# Altium PCB MPBoard_ext.PcbDoc (part 2 of 3)
Units mm, origin at the board's own origin, x right, y up, seen from the top; angles counter-clockwise.
Board outline 305 x 110 mm, 2 copper layers (Top Layer, Bottom Layer), stack 1.571 mm thick; 340 components, 268 nets, 1174 pads, 215 vias.
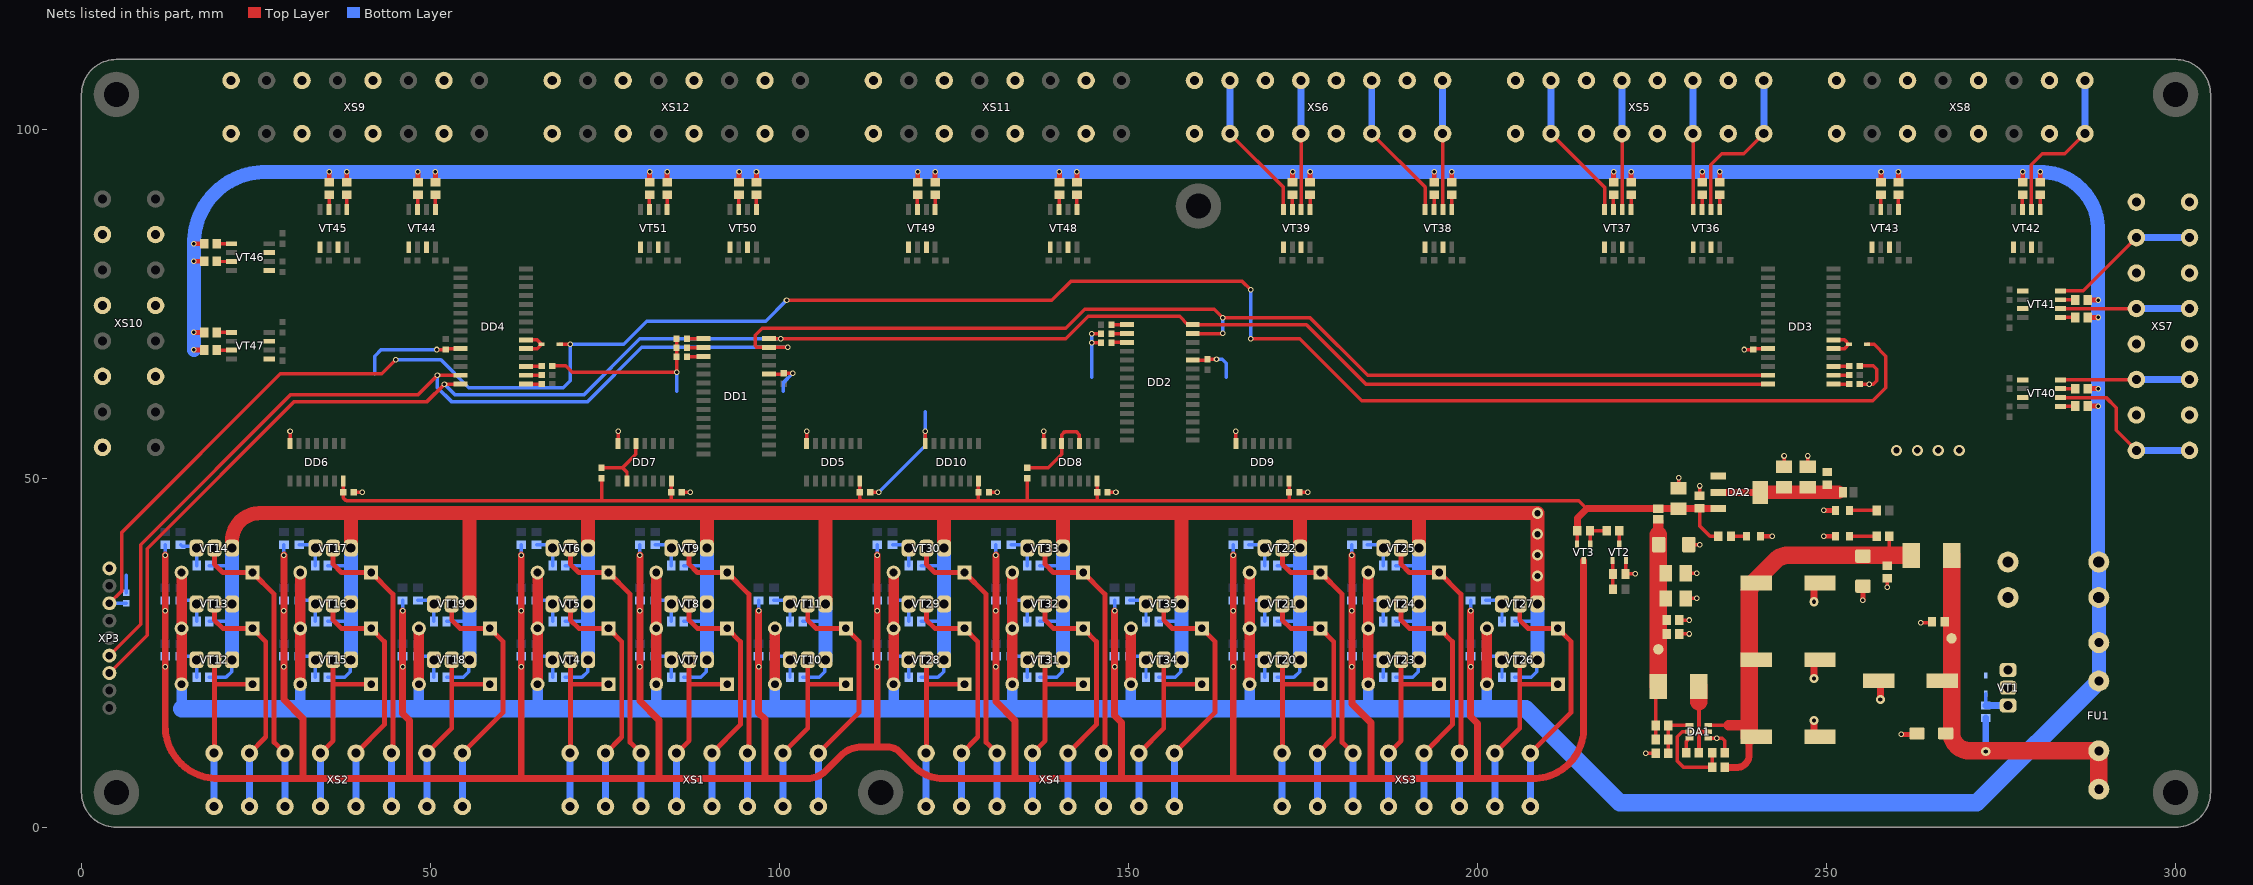
[diagram p2: the nets of this part, all layers, seen from the top]

## Via types
v1: diameter 0.8, hole 0.5, Top Layer to Bottom Layer, 201 vias
v2: diameter 1.6, hole 0.9, Top Layer to Bottom Layer, 8 vias
v3: diameter 1.3, hole 0.6, Top Layer to Bottom Layer, 6 vias

## Nets (pads, with @x,y where several pads share a name; then routed paths per layer and width w, separated by ;. In a path a pad name is that pad's centre, name@x,y a point inside that pad or via, vN(x,y) a via of type N, cw(c..) or ccw(c..) an arc to the next point about the centre after c; other vN are vias at no path point) (continued)
+5V: C13.1 C14.2 C22.2 C23.2 C24.2 C25.2 C26.2 C27.2 DA2.3 DD5.14 DD6.14 DD7.14 DD8.14 DD9.14 DD10.14 J1.2 R7.1 R12.2 R186.1 R187.2 VT3.2 | length 235.6
  Top Layer w0.5: DD6.14@37.5,49.6 C23.2@37.5,48 37.5,47.4 ccw(c38.1,47.4) 38.1,46.8 74.5,46.8 ; R186.1@74.5,50 74.5,46.8 ; DD7.14@84.5,49.6 C24.2@84.5,48 84.5,46.8 ; DD5.14@111.5,49.6 111.5,47.093 111.793,46.8 115.5,46.8 ; DD10.14@128.5,49.6 C27.2@128.5,48 128.5,46.8 ; R187.2@135.5,50 135.5,46.8 ; DD8.14@145.5,49.6 C25.2@145.5,48 145.5,46.8 ; DD9.14@173,49.6 C26.2@173,48 173,46.8 ; VT3.2@214.25,40.6 214.25,42.45 R12.2@214.3,42.5 ; 215.65,45.65 214.5,46.8 173,46.8 ; C14.2@231.8,45.7 231.8,43.2 233.3,41.7 R7.1@234.5,41.7 ; 74.5,46.8 84.5,46.8 ; 84.5,46.8 115.5,46.8 ; 115.5,46.8 128.5,46.8 ; 128.5,46.8 135.5,46.8 ; 135.5,46.8 145.5,46.8 ; 145.5,46.8 173,46.8
  Top Layer w1: R12.2@214.3,42.5 214.3,44.3 215.65,45.65 J1.2@225.9,45.65 C13.1@228.8,45.65 ; C13.1@228.85,45.7 C14.2@231.8,45.7 DA2.3@234.5,45.7
+24V: FU1.1 FU1.3 R134.1 R135.1 R136.1 R137.1 R138.1 R139.1 R140.1 R141.1 R142.1 R143.1 R144.1 R145.1 R146.1 R147.1 R148.1 R149.1 R169.1 R170.1 R171.1 R172.1 R173.1 R174.1 R175.1 R176.1 R177.1 R178.1 R179.1 R180.1 R181.1 R182.1 R183.1 R184.1 VD5.2 VD6.2 VD7.2 VD8.2 VD9.2 VD10.2 VD11.2 VD12.2 VD13.2 VD14.2 VD15.2 VD16.2 VD17.2 VD18.2 VD19.2 VD20.2 VD21.2 VD22.2 VD23.2 VD24.2 VD25.2 VD26.2 VD27.2 VD28.2 VD29.2 VD30.2 VD31.2 VD32.2 VD33.2 VD34.2 VD35.2 VD36.2 XP1.1 XP1.2 | length 900.7
  Top Layer w0.7: v1(16.1,68.4) R176.1@17.6,68.4 ; v1(16.1,70.9) R175.1@17.6,70.9 ; v1(16.1,81.1) R174.1@17.6,81.1 ; v1(16.1,83.6) R173.1@17.6,83.6 ; R172.1@35.5,92.4 v1(35.5,93.9) ; R171.1@38,92.4 v1(38,93.9) ; R170.1@48.2,92.4 v1(48.2,93.9) ; R169.1@50.7,92.4 v1(50.7,93.9) ; R184.1@81.4,92.4 v1(81.4,93.9) ; R183.1@83.9,92.4 v1(83.9,93.9) ; R182.1@94.2,92.4 v1(94.2,93.9) ; R181.1@96.7,92.4 v1(96.7,93.9) ; R180.1@119.8,92.4 v1(119.8,93.9) ; R179.1@122.3,92.4 v1(122.3,93.9) ; R178.1@140.1,92.4 v1(140.1,93.9) ; R177.1@142.6,92.4 v1(142.6,93.9) ; R141.1@173.5,92.4 v1(173.5,93.9) ; R140.1@176,92.4 v1(176,93.9) ; R139.1@193.8,92.4 v1(193.8,93.9) ; R138.1@196.3,92.4 v1(196.3,93.9) ; R137.1@219.5,92.4 v1(219.5,93.9) ; R136.1@222,92.4 v1(222,93.9) ; R135.1@232.2,92.4 v1(232.2,93.9) ; R134.1@234.7,92.4 v1(234.7,93.9) ; R149.1@257.8,92.4 v1(257.8,93.9) ; R148.1@260.3,92.4 v1(260.3,93.9) ; R147.1@278.1,92.4 v1(278.1,93.9) ; R146.1@280.6,92.4 v1(280.6,93.9) ; R142.1@287.4,60.34 v1(288.9,60.34) ; R143.1@287.4,62.84 v1(288.9,62.84) ; R144.1@287.4,73.04 v1(288.9,73.04) ; R145.1@287.4,75.54 v1(288.9,75.54)
  Top Layer w1.5: VD13.2@14.34,20.5 VD15.2@14.34,36.5 ; VD16.2@31.34,20.5 VD17.2@31.34,28.5 VD18.2@31.34,36.5 ; VD19.2@48.34,20.5 VD20.2@48.34,28.5 ; VD5.2@65.34,20.5 VD7.2@65.34,36.5 ; VD8.2@82.34,20.5 VD9.2@82.34,28.5 VD10.2@82.34,36.5 ; VD11.2@99.34,20.5 VD12.2@99.34,28.5 ; VD29.2@116.34,20.5 VD30.2@116.34,28.5 VD31.2@116.34,36.5 ; VD32.2@133.34,20.5 VD33.2@133.34,28.5 VD34.2@133.34,36.5 ; VD35.2@150.34,20.5 VD36.2@150.34,28.5 ; VD21.2@167.34,20.5 VD22.2@167.34,28.5 VD23.2@167.34,36.5 ; VD24.2@184.34,20.5 VD25.2@184.34,28.5 VD26.2@184.34,36.5 ; VD27.2@201.34,20.5 VD28.2@201.34,28.5
  Bottom Layer w1.5: 14.34,17 VD13.2@14.34,20.5 ; 31.34,17 VD16.2@31.34,20.5 ; 48.34,17 VD19.2@48.34,20.5 ; 65.34,17 VD5.2@65.34,20.5 ; 82.34,17 VD8.2@82.34,20.5 ; 99.34,17 VD11.2@99.34,20.5 ; 116.34,17 VD29.2@116.34,20.5 ; 133.34,17 VD32.2@133.34,20.5 ; 150.34,17 VD35.2@150.34,20.5 ; 167.34,17 VD21.2@167.34,20.5 ; 184.34,17 VD24.2@184.34,20.5 ; 201.34,17 VD27.2@201.34,20.5
  Bottom Layer w2: v1(16.1,68.4) v1(16.1,70.9) v1(16.1,81.1) v1(16.1,83.6) cw(c26.4,83.6) 26.4,93.9 v1(35.5,93.9) v1(38,93.9) v1(48.2,93.9) v1(50.7,93.9) v1(81.4,93.9) v1(83.9,93.9) v1(94.2,93.9) v1(96.7,93.9) v1(119.8,93.9) v1(122.3,93.9) v1(173.5,93.9) v1(176,93.9) v1(193.8,93.9) v1(196.3,93.9) v1(219.5,93.9) v1(222,93.9) v1(232.2,93.9) v1(234.7,93.9) v1(257.8,93.9) v1(260.3,93.9) v1(278.1,93.9) v1(280.6,93.9) cw(c280.6,85.6) 288.9,85.6 v1(288.9,75.54) v1(288.9,73.04) v1(288.9,62.84) v1(288.9,60.34) XP1.1@288.9,38 ; FU1.3@289,20.96 FU1.1@289,26.46 XP1.2@289,32.92 XP1.1@289,38
  Bottom Layer w2.5: 14.34,17 31.34,17 48.34,17 65.34,17 82.34,17 99.34,17 116.34,17 133.34,17 150.34,17 167.34,17 184.34,17 201.34,17 206.9,17 220.4,3.5 271.54,3.5 FU1.3@289,20.96
cPNP: R17.1 R20.1 R23.1 R26.1 R29.1 R32.1 R35.1 R38.1 R41.1 R44.1 R47.1 R50.1 R53.1 R56.1 R59.1 R62.1 R68.1 R71.1 R74.1 R77.1 R80.1 R83.1 R86.1 R89.1 R92.1 R95.1 R98.1 R101.1 R104.1 R107.1 R110.1 R113.1 VT3.3 | length 632.7
  Top Layer w1: v1(12,39) v1(12,31) v1(12,23) 12,14.5 ccw(c19.5,14.5) 19.5,7 31.7,7 ; v1(29,39) v1(29,31) v1(29,23) 29,18.3 31.7,15.6 31.7,7 ; v1(46,31) v1(46,23) 46,16.3 47,15.3 47,7 ; v1(63,39) v1(63,31) v1(63,23) 63,7 ; v1(80,39) v1(80,31) v1(80,23) 80,18.1 82.7,15.4 82.7,7 ; v1(97,31) v1(97,23) 97,16.4 97.9,15.5 97.9,7 ; v1(114,39) v1(114,31) v1(114,23) 114,11.5 ; v1(131,39) v1(131,31) v1(131,23) 131,18 133.7,15.3 133.7,7 ; v1(148,31) v1(148,23) 148,16 149,15 149,7 ; v1(165,39) v1(165,31) v1(165,23) 165,7 ; v1(182,39) v1(182,31) v1(182,23) 182,17.7 184.7,15 184.7,7 ; v1(199,31) v1(199,23) 199,15.9 200,14.9 200,7 ; VT3.3@215.2,38.2 215.2,14.2 cw(c208,14.2) 208,7 200,7 ; 31.7,7 47,7 ; 47,7 63,7 ; 63,7 82.7,7 ; 82.7,7 97.9,7 ; 97.9,7 104.086,7 ccw(c104.086,10.414) 106.5,8 108.793,10.293 cw(c111.707,7.379) 111.707,11.5 114,11.5 ; 114,11.5 115.5,11.5 cw(c115.5,9.086) 117.207,10.793 119.293,8.707 ccw(c123.414,12.828) 123.414,7 133.7,7 ; 133.7,7 149,7 ; 149,7 165,7 ; 165,7 184.7,7 ; 184.7,7 200,7
  Bottom Layer w0.5: v1(12,23) R41.1@12,24.5 ; v1(12,31) R44.1@12,32.5 ; v1(12,39) R47.1@12,40.5 ; v1(29,23) R50.1@29,24.5 ; v1(29,31) R53.1@29,32.5 ; v1(29,39) R56.1@29,40.5 ; v1(46,23) R59.1@46,24.5 ; v1(46,31) R62.1@46,32.5 ; v1(63,23) R17.1@63,24.5 ; v1(63,31) R20.1@63,32.5 ; v1(63,39) R23.1@63,40.5 ; v1(80,23) R26.1@80,24.5 ; v1(80,31) R29.1@80,32.5 ; v1(80,39) R32.1@80,40.5 ; v1(97,23) R35.1@97,24.5 ; v1(97,31) R38.1@97,32.5 ; v1(114,23) R92.1@114,24.5 ; v1(114,31) R95.1@114,32.5 ; v1(114,39) R98.1@114,40.5 ; v1(131,23) R101.1@131,24.5 ; v1(131,31) R104.1@131,32.5 ; v1(131,39) R107.1@131,40.5 ; v1(148,23) R110.1@148,24.5 ; v1(148,31) R113.1@148,32.5 ; v1(165,23) R68.1@165,24.5 ; v1(165,31) R71.1@165,32.5 ; v1(165,39) R74.1@165,40.5 ; v1(182,23) R77.1@182,24.5 ; v1(182,31) R80.1@182,32.5 ; v1(182,39) R83.1@182,40.5 ; v1(199,23) R86.1@199,24.5 ; v1(199,31) R89.1@199,32.5
GND: C2.2 C3.2 C4.2 C5.2 C6.2 C7.2 C8.2 C9.2 C10.2 C11.2 C13.2 C14.1 C15.1 C16.2 C17.2 C18.1 C19.1 C20.1 C21.1 C22.1 C23.1 C24.1 C25.1 C26.1 C27.1 DA1.1 DA2.1 DD1.10 DD2.10 DD3.10 DD4.10 DD5.7 DD6.7 DD7.7 DD8.7 DD9.7 DD10.7 HL1.2 HL2.2 HL3.2 R4.2 R6.2 R10.2 R13.1 R14.1 R15.1 R18.1 R21.1 R24.1 R27.1 R30.1 R33.1 R36.1 R39.1 R42.1 R45.1 R48.1 R51.1 R54.1 R57.1 R60.1 R63.1 R65.1 R66.1 R69.1 R72.1 R75.1 R78.1 R81.1 R84.1 R87.1 R90.1 R93.1 R96.1 R99.1 R102.1 R105.1 R108.1 R111.1 R114.1 R131.2 R133.1 R168.1 R185.1 VD1.1 VD2.1 VD3.1 VD4.1 VT1.3 VT2.2 VT4.3 VT5.3 VT6.3 VT7.3 VT8.3 VT9.3 VT10.3 VT11.3 VT12.3 VT13.3 VT14.3 VT15.3 VT16.3 VT17.3 VT18.3 VT19.3 VT20.3 VT21.3 VT22.3 VT23.3 VT24.3 VT25.3 VT26.3 VT27.3 VT28.3 VT29.3 VT30.3 VT31.3 VT32.3 VT33.3 VT34.3 VT35.3 VT36.5 VT36.7 VT37.5 VT37.7 VT38.5 VT38.7 VT39.5 VT39.7 VT40.5 VT40.7 VT41.5 VT41.7 VT42.5 VT42.7 VT43.5 VT43.7 VT44.5 VT44.7 VT45.5 VT45.7 VT46.5 VT46.7 VT47.5 VT47.7 VT48.5 VT48.7 VT49.5 VT49.7 VT50.5 VT50.7 VT51.5 VT51.7 XP3.9 XS5.2 XS5.4 XS5.6 XS5.8 XS5.10 XS5.12 XS5.14 XS5.16 XS6.2 XS6.4 XS6.6 XS6.8 XS6.10 XS6.12 XS6.14 XS6.16 XS7.2 XS7.4 XS7.6 XS7.8 XS7.10 XS7.12 XS7.14 XS7.16 XS8.2 XS8.4 XS8.6 XS8.8 XS8.10 XS8.12 XS8.14 XS8.16 XS9.2 XS9.4 XS9.6 XS9.8 XS9.10 XS9.12 XS9.14 XS9.16 XS10.2 XS10.4 XS10.6 XS10.8 XS10.10 XS10.12 XS10.14 XS11.2 XS11.4 XS11.6 XS11.8 XS11.10 XS11.12 XS11.14 XS11.16 XS12.2 XS12.4 XS12.6 XS12.8 XS12.10 XS12.12 XS12.14 XS12.16 | length 717.6
  Top Layer w0.5: DD6.7@29.88,55 v1@29.88,56.745 ; C23.1@39,48 v1(40.2,48) ; v1(50.9,68.45) C21.1@52.2,68.45 ; C21.1@52.32,68.57 DD4.10@54.3,68.57 ; R168.1@67.45,66.1 69.4,66.1 70.3,65.2 v1(85.3,65.2) 85.3,67.35 R15.1@85.25,67.4 R14.1@85.25,68.7 R13.1@85.25,70 ; DD7.7@76.88,55 v1@76.88,56.745 ; C24.1@86,48 v1(87.2,48) ; DD1.10@98.5,64.93 C18.1@100.48,64.93 ; C18.1@100.6,65.05 v1(101.9,65.05) ; DD5.7@103.88,55 v1@103.88,56.745 ; C22.1@113,48 v1(114.2,48) ; v1(120.875,56.75) 120.88,56.745 DD10.7@120.88,55 ; C27.1@130,48 v1(131.2,48) ; v1(137.875,56.75) 137.88,56.745 DD8.7@137.88,55 ; v1(144.7,69.4) R66.1@146.05,69.4 ; v1(144.7,70.7) R65.1@146.05,70.7 ; C25.1@147,48 v1(148.2,48) ; DD2.10@159.2,66.93 C19.1@161.18,66.93 ; C19.1@161.3,67.05 v1(162.6,67.05) ; v1(165.375,56.75) 165.38,56.745 DD9.7@165.38,55 ; C26.1@174.5,48 v1(175.7,48) ; R10.2@221.18,36.3 R10.2@221.2,36.3 ; VT2.2@221.25,38.2 221.25,36.35 R10.2@221.2,36.3 ; v1(222.6,36.3) R10.2@221.2,36.3 ; v1(224.08,10.6) R6.2@225.48,10.6 ; C13.2@228.8,48.55 v1(228.8,50.1) ; C10.2@228.92,27.7 v1(230.32,27.7) ; C11.2@228.92,29.7 v1(230.32,29.7) ; C8.2@229.85,32.8 v1(231.4,32.8) ; C9.2@229.85,36.4 v1(231.4,36.4) ; VD3.1@230.25,40.5 v1(231.8,40.5) ; C14.1@231.8,47.48 C14.1@231.8,47.5 v1(231.8,48.9) ; DA1.1@233.05,12.75 v1(234.25,12.75) 235.05,12.75 235.4,12.4 R4.2@235.4,10.7 ; v1(238.2,68.45) C20.1@239.5,68.45 239.62,68.57 DD3.10@241.6,68.57 ; C17.2@243.9,51.65 v1(243.9,53.2) ; C16.2@247.3,51.65 v1(247.3,53.2) ; R131.2@254.75,63.5 v1(256.1,63.5) 256.7,63.5 257.2,64 257.2,65.6 256.7,66.1 R133.1@254.75,66.1 ; v1(258.7,34.42) C7.2@258.7,35.72 ; v1(263.5,29.32) C2.2@264.8,29.32
  Top Layer w0.7: HL1.2@240.5,41.7 v1(242.2,41.7) ; v1(249.6,41.7) HL2.2@251.3,41.7 ; v1(249.6,45.4) HL3.2@251.3,45.4 ; v1(255.2,32.52) VD2.1@255.2,34.17 ; v1(260.7,13.32) VD1.1@262.55,13.32
  Top Layer w1: v3(248.2,15.32) 248.2,13.37 C4.2@248.75,12.82 ; v3(248.2,21.32) 248.2,23.27 C5.2@248.75,23.82 ; v3(248.2,32.32) 248.2,34.27 C6.2@248.75,34.82 ; C3.2@257.15,20.82 257.7,20.27 v3(257.7,18.32)
  Top Layer w2: VT14.3@21.58,40 21.58,41.08 cw(c25.5,41.08) 25.5,45 38.58,45 ; VT17.3@38.58,40 38.58,45 ; VT19.3@55.58,32 55.58,45 ; VT6.3@72.58,40 72.58,45 ; VT9.3@89.58,40 89.58,45 ; VT11.3@106.58,32 106.58,45 ; VT30.3@123.58,40 123.58,45 ; VT33.3@140.58,40 140.58,45 ; VT35.3@157.58,32 157.58,45 ; VT22.3@174.58,40 174.58,45 ; VT25.3@191.58,40 191.58,45 ; VT27.3@208.58,32 v2(208.58,36) v2(208.58,39) v2(208.58,42) v2(208.58,45) 191.58,45 ; 38.58,45 55.58,45 ; 55.58,45 72.58,45 ; 72.58,45 89.58,45 ; 89.58,45 106.58,45 ; 106.58,45 123.58,45 ; 123.58,45 140.58,45 ; 140.58,45 157.58,45 ; 157.58,45 174.58,45 ; 174.58,45 191.58,45
  Bottom Layer w0.5: R185.1@6.4,33.6 6.4,36.1 ; R42.1@18.3,21.5 20.7,21.5 21.5,22.3 VT12.3@21.5,23.92 ; R45.1@18.3,29.5 21.58,29.5 ; R48.1@18.3,37.5 21.58,37.5 ; R51.1@35.3,21.5 37.7,21.5 38.5,22.3 VT15.3@38.5,23.92 ; R54.1@35.3,29.5 38.58,29.5 ; R57.1@35.3,37.5 38.58,37.5 ; 42,65 42,67.5 42.95,68.45 v1(50.9,68.45) ; R60.1@52.3,21.5 54.7,21.5 55.5,22.3 55.5,23.92 VT18.3@55.58,24 ; R63.1@52.3,29.5 55.58,29.5 ; R18.1@69.3,21.5 71.7,21.5 72.5,22.3 VT4.3@72.5,23.92 ; R21.1@69.3,29.5 72.58,29.5 ; R24.1@69.3,37.5 72.58,37.5 ; 85.3,62.5 v1(85.3,65.2) ; R27.1@86.3,21.5 88.7,21.5 89.5,22.3 VT7.3@89.5,23.92 ; R30.1@86.3,29.5 89.58,29.5 ; R33.1@86.3,37.5 89.58,37.5 ; 100.5,62.5 100.5,63.65 v1(101.9,65.05) ; R36.1@103.3,21.5 105.7,21.5 106.5,22.3 106.5,23.92 VT10.3@106.58,24 ; R39.1@103.3,29.5 106.58,29.5 ; v1(114.2,48) 120.875,54.675 v1(120.875,56.75) 120.875,59.5 ; R93.1@120.3,21.5 122.7,21.5 123.5,22.3 VT28.3@123.5,23.92 ; R96.1@120.3,29.5 123.58,29.5 ; R99.1@120.3,37.5 123.58,37.5 ; R102.1@137.3,21.5 139.7,21.5 140.5,22.3 VT31.3@140.5,23.92 ; R105.1@137.3,29.5 140.58,29.5 ; R108.1@137.3,37.5 140.58,37.5 ; 144.7,64.5 v1(144.7,69.4) v1(144.7,70.7) ; R111.1@154.3,21.5 156.7,21.5 157.5,22.3 157.5,23.92 VT34.3@157.58,24 ; R114.1@154.3,29.5 157.58,29.5 ; v1(162.6,67.05) 163.45,67.05 164,66.5 164,64.5 ; R69.1@171.3,21.5 173.7,21.5 174.5,22.3 VT20.3@174.5,23.92 ; R72.1@171.3,29.5 174.58,29.5 ; R75.1@171.3,37.5 174.58,37.5 ; R78.1@188.3,21.5 190.7,21.5 191.5,22.3 VT23.3@191.5,23.92 ; R81.1@188.3,29.5 191.58,29.5 ; R84.1@188.3,37.5 191.58,37.5 ; R87.1@205.3,21.5 207.7,21.5 208.5,22.3 208.5,23.92 VT26.3@208.58,24 ; R90.1@205.3,29.5 208.58,29.5
  Bottom Layer w2: VT12.3@21.58,24 21.58,29.5 VT13.3@21.58,32 21.58,37.5 VT14.3@21.58,40 ; VT15.3@38.58,24 38.58,29.5 VT16.3@38.58,32 38.58,37.5 VT17.3@38.58,40 ; VT18.3@55.58,24 55.58,29.5 VT19.3@55.58,32 ; VT4.3@72.58,24 72.58,29.5 VT5.3@72.58,32 72.58,37.5 VT6.3@72.58,40 ; VT7.3@89.58,24 89.58,29.5 VT8.3@89.58,32 89.58,37.5 VT9.3@89.58,40 ; VT10.3@106.58,24 106.58,29.5 VT11.3@106.58,32 ; VT28.3@123.58,24 123.58,29.5 VT29.3@123.58,32 123.58,37.5 VT30.3@123.58,40 ; VT31.3@140.58,24 140.58,29.5 VT32.3@140.58,32 140.58,37.5 VT33.3@140.58,40 ; VT34.3@157.58,24 157.58,29.5 VT35.3@157.58,32 ; VT20.3@174.58,24 174.58,29.5 VT21.3@174.58,32 174.58,37.5 VT22.3@174.58,40 ; VT23.3@191.58,24 191.58,29.5 VT24.3@191.58,32 191.58,37.5 VT25.3@191.58,40 ; VT26.3@208.58,24 208.58,29.5 VT27.3@208.58,32
  other v1: 29.875,56.75 76.875,56.75 103.875,56.75
  other v2: 260,54 263,54 266,54 269,54
INTAB: R185.2 VD37.2 VD38.2 XP3.7 | length 308.7
  Top Layer w0.5: XP3.7@4,32.1 5.8,33.9 5.8,42.3 28.5,65 43,65 v1(45,67) ; VD38.2@68.5,69.2 v1(70,69.2) ; v1(101,75.5) 139,75.5 141.7,78.2 166.3,78.2 v1(167.5,77) ; v1(167.5,70) 174.5,70 183.4,61.1 256.6,61.1 258.5,63 258.5,67.5 256.8,69.2 VD37.2@255.8,69.2
  Bottom Layer w0.5: XP3.7@4,32.1 R185.2@6.4,32.1 ; v1(45,67) 51.5,67 55.5,63 69,63 70,64 v1(70,69.2) 77.7,69.2 81,72.5 98,72.5 v1(101,75.5) ; v1(167.5,70) v1(167.5,77)
MISO: DD1.14 DD2.14 DD3.14 DD4.14 XP3.3 | length 275.3
  Top Layer w0.5: XP3.3@4,22.1 9.4,27.5 9.4,39.9 30.5,61 49.5,61 v1(52,63.5) 52.01,63.49 DD4.14@54.3,63.49 ; DD1.14@98.5,70 100.19,70 v1(100.2,69.99) 140.99,69.99 144.2,73.2 157.31,73.2 158.5,72.01 DD2.14@159.2,72.01 175.49,72.01 184.01,63.49 DD3.14@241.6,63.49
  Bottom Layer w0.5: v1(52,63.5) 53.5,62 72,62 79.99,69.99 v1(100.2,69.99)
MOSI: DD1.13 DD2.13 DD3.13 DD4.13 XP3.4 | length 293
  Top Layer w0.5: XP3.4@4,24.6 8.5,29.1 8.5,40.5 30,62 48.24,62 v1(51,64.76) DD4.13@54.3,64.76 ; v1(101.2,68.79) 101.15,68.74 DD1.13@98.5,68.74 96.76,68.74 96.5,69 96.5,70.5 97.5,71.5 141,71.5 143.7,74.2 162.3,74.2 v1(163.5,73) 176,73 184.24,64.76 DD3.13@241.6,64.76 ; DD2.13@159.2,70.74 163.44,70.74 v1(163.5,70.8)
  Bottom Layer w0.5: v1(51,64.76) 51,63 53,61 72.5,61 80.29,68.79 v1(101.2,68.79) ; v1(163.5,70.8) v1(163.5,73)
NetC1_1: C1.1 DA1.6 | length 2.2
  Top Layer w0.5: C1.1@229.9,10.7 229.9,12.3 DA1.6@230.35,12.75
NetC1_2: C1.2 DA1.2 L2.1 | length 10.8
  Top Layer w0.6: C1.2@231.7,10.7 231.7,13.7 ; 231.7,18 231.7,13.7 ; DA1.2@233.05,13.7 231.7,13.7
  Top Layer w2.5: 231.7,18 L2.1@231.7,20.2
NetC2_1: C2.1 C3.1 FU1.2 FU1.4 L1.1 R1.2 TP1.1 VD1.2 | length 58.2
  Top Layer w2.5: L1.1@267.9,38.96 267.9,29.46 267.9,13.5 ccw(c270.44,13.5) 270.44,10.96 ; 270.54,10.96 FU1.2@289,10.96 FU1.4@289,5.46
  Bottom Layer w1: v3(272.8,10.86) R1.2@272.8,15.66
NetC4_1: C4.1 C5.1 C6.1 C7.1 DA1.3 L1.2 R2.2 R3.1 VD2.2 | length 63.2
  Top Layer w0.5: DA1.3@233.05,14.61 236,14.61 ; 259,38.96 R2.2@259,41.76
  Top Layer w1: R3.1@235.4,8.6 235.4,8.56 237.1,8.56 ccw(c237.1,10.36) 238.9,10.36 C4.1@238.9,12.96 ; C5.1@238.9,24.009 238.949,23.96 C5.1@239.95,23.96
  Top Layer w1.5: 236,14.61 238.9,14.61
  Top Layer w2.5: C4.1@238.9,12.96 238.9,14.61 238.9,24.009 238.9,33.408 cw(c241.44,33.408) 239.644,35.204 242.656,38.216 cw(c244.452,36.42) 244.452,38.96 247.7,38.96 255.5,38.96 259,38.96 L1.2@262.1,38.96
NetC8_1: C8.1 C9.1 C10.1 C11.1 C12.1 J1.1 L2.2 R5.1 TP2.1 VD3.2 | length 31.4
  Top Layer w0.5: C12.1@225.5,12.6 R5.1@225.5,14.6 225.5,19.8 L2.2@225.9,20.2
  Top Layer w1.5: 225.9,41.9 J1.1@225.9,43.8
  Top Layer w2.5: L2.2@225.9,20.2 TP2.1@225.9,25.5 225.9,36.4 225.9,41.9
NetC12_2: C12.2 DA1.4 R5.2 R6.1 | length 7.1
  Top Layer w0.5: R6.1@227.3,10.6 C12.2@227.3,12.6 227.35,12.65 227.3,12.7 R5.2@227.3,14.6 227.35,14.65 DA1.4@230.35,14.65
NetC15_2: C15.2 C16.1 C17.1 DA2.2 DA2.4 J2.1 | length 17.2
  Top Layer w1: DA2.2@234.5,48 DA2.4@240.5,48
  Top Layer w2: DA2.4@240.5,48 251.7,48
NetDA1_5: DA1.5 R3.2 R4.1 | length 13
  Top Layer w0.5: DA1.5@230.35,13.7 229.3,13.7 228.6,13 228.6,9.5 229.5,8.6 R3.2@233.6,8.6 R4.1@233.6,10.7
NetDD1_15: DD1.15 R13.2 | length 2.4
  Top Layer w0.5: R13.2@86.75,70 86.755,70.005 89.095,70.005 DD1.15@89.1,70.01
NetDD1_16: DD1.16 R14.2 | length 2.4
  Top Layer w0.5: R14.2@86.75,68.7 86.77,68.72 89.08,68.72 DD1.16@89.1,68.74
NetDD1_17: DD1.17 R15.2 | length 2.4
  Top Layer w0.5: R15.2@86.75,67.4 86.785,67.435 89.065,67.435 DD1.17@89.1,67.47
NetDD2_15: DD2.15 R64.1 | length 2.2
  Top Layer w0.5: R64.1@147.56,72.01 DD2.15@149.8,72.01
NetDD2_16: DD2.16 R65.2 | length 2.3
  Top Layer w0.5: R65.2@147.55,70.7 147.59,70.74 DD2.16@149.8,70.74
NetDD2_17: DD2.17 R66.2 | length 2.3
  Top Layer w0.5: R66.2@147.55,69.4 147.62,69.47 DD2.17@149.8,69.47
NetDD3_15: DD3.15 R131.1 | length 2.2
  Top Layer w0.5: DD3.15@251,63.49 R131.1@253.24,63.49
NetDD3_16: DD3.16 R132.1 | length 2.3
  Top Layer w0.5: DD3.16@251,64.76 253.21,64.76 R132.1@253.25,64.8
NetDD3_17: DD3.17 R133.2 | length 2.3
  Top Layer w0.5: DD3.17@251,66.03 253.18,66.03 R133.2@253.25,66.1
NetDD3_19: DD3.19 DD3.20 VD37.1 | length 4.9
  Top Layer w0.5: DD3.19@251,68.57 252.57,68.57 VD37.1@253.2,69.2 252.56,69.84 DD3.20@251,69.84
NetDD4_15: DD4.15 R166.1 | length 2.3
  Top Layer w0.5: DD4.15@63.7,63.49 63.705,63.495 65.945,63.495 R166.1@65.95,63.5
NetDD4_16: DD4.16 R167.1 | length 2.3
  Top Layer w0.5: DD4.16@63.7,64.76 63.72,64.78 65.93,64.78 R167.1@65.95,64.8
NetDD4_17: DD4.17 R168.2 | length 2.3
  Top Layer w0.5: DD4.17@63.7,66.03 63.735,66.065 65.915,66.065 R168.2@65.95,66.1
NetDD4_19: DD4.19 DD4.20 VD38.1 | length 4.9
  Top Layer w0.5: DD4.19@63.7,68.57 65.27,68.57 VD38.1@65.9,69.2 65.26,69.84 DD4.20@63.7,69.84
NetDD7_11: DD7.5 DD7.9 R186.2 | length 9.5
  Top Layer w0.5: R186.2@74.5,51.5 77.5,51.5 ; DD7.9@78.15,49.6 78.15,50.85 77.5,51.5 ; DD7.5@79.42,55 79.42,53.42 77.5,51.5
NetDD8_3: DD8.3 DD8.5 R187.1 | length 12.7
  Top Layer w0.5: R187.1@135.5,51.5 138.5,51.5 140.42,53.42 DD8.5@140.42,55 140.42,56.22 140.9,56.7 142.5,56.7 142.96,56.24 DD8.3@142.96,55
NetHL1_1: HL1.1 R7.2 | length 2.2
  Top Layer w0.5: R7.2@236.3,41.7 HL1.1@238.5,41.7
NetHL2_1: HL2.1 R2.1 | length 3.9
  Top Layer w0.5: HL2.1@253.3,41.7 R2.1@257.2,41.7
NetHL3_1: HL3.1 R8.2 | length 3.9
  Top Layer w0.5: HL3.1@253.3,45.4 R8.2@257.2,45.4
NetR1_1: R1.1 VD4.2 VT1.1 | length 4.9
  Bottom Layer w0.5: R1.1@272.8,17.46 VD4.2@272.8,19.16
  Bottom Layer w1: R1.1@272.8,17.46 VT1.1@276,17.46
NetR9_2: R9.2 R10.1 VT2.1 | length 4.1
  Top Layer w0.5: VT2.1@219.35,38.2 219.35,36.35 R10.1@219.4,36.3 R9.2@219.4,34.1
NetR11_1: R11.1 VT2.3 | length 1.9
  Top Layer w0.5: VT2.3@220.3,40.6 R11.1@220.3,42.5
NetR11_2: R11.2 R12.1 VT3.1 | length 4.3
  Top Layer w0.5: VT3.1@216.15,40.6 216.15,42.45 R12.1@216.1,42.5 R11.2@218.5,42.5
NetR16_2: R16.2 R18.2 VT4.1 | length 5
  Bottom Layer w0.5: R16.2@65.2,24.5 67,24.5 VT4.1@67.5,24 R18.2@67.5,21.5
NetR19_2: R19.2 R21.2 VT5.1 | length 5
  Bottom Layer w0.5: R19.2@65.2,32.5 67,32.5 VT5.1@67.5,32 R21.2@67.5,29.5
NetR22_2: R22.2 R24.2 VT6.1 | length 5
  Bottom Layer w0.5: R22.2@65.2,40.5 67,40.5 VT6.1@67.5,40 R24.2@67.5,37.5
NetR25_2: R25.2 R27.2 VT7.1 | length 5
  Bottom Layer w0.5: R25.2@82.2,24.5 84,24.5 VT7.1@84.5,24 R27.2@84.5,21.5
NetR28_2: R28.2 R30.2 VT8.1 | length 5
  Bottom Layer w0.5: R28.2@82.2,32.5 84,32.5 VT8.1@84.5,32 R30.2@84.5,29.5
NetR31_2: R31.2 R33.2 VT9.1 | length 5
  Bottom Layer w0.5: R31.2@82.2,40.5 84,40.5 VT9.1@84.5,40 R33.2@84.5,37.5
NetR34_2: R34.2 R36.2 VT10.1 | length 5
  Bottom Layer w0.5: R34.2@99.2,24.5 101,24.5 VT10.1@101.5,24 R36.2@101.5,21.5
NetR37_2: R37.2 R39.2 VT11.1 | length 5
  Bottom Layer w0.5: R37.2@99.2,32.5 101,32.5 VT11.1@101.5,32 R39.2@101.5,29.5
NetR40_2: R40.2 R42.2 VT12.1 | length 5
  Bottom Layer w0.5: R40.2@14.2,24.5 16,24.5 VT12.1@16.5,24 R42.2@16.5,21.5
NetR43_2: R43.2 R45.2 VT13.1 | length 5
  Bottom Layer w0.5: R43.2@14.2,32.5 16,32.5 VT13.1@16.5,32 R45.2@16.5,29.5
NetR46_2: R46.2 R48.2 VT14.1 | length 5
  Bottom Layer w0.5: R46.2@14.2,40.5 14.45,40.25 16.25,40.25 VT14.1@16.5,40 R48.2@16.5,37.5
NetR49_2: R49.2 R51.2 VT15.1 | length 5
  Bottom Layer w0.5: R49.2@31.2,24.5 33,24.5 VT15.1@33.5,24 R51.2@33.5,21.5
NetR52_2: R52.2 R54.2 VT16.1 | length 5
  Bottom Layer w0.5: R52.2@31.2,32.5 33,32.5 VT16.1@33.5,32 R54.2@33.5,29.5
NetR55_2: R55.2 R57.2 VT17.1 | length 5
  Bottom Layer w0.5: R55.2@31.2,40.5 33,40.5 VT17.1@33.5,40 R57.2@33.5,37.5
NetR58_2: R58.2 R60.2 VT18.1 | length 5
  Bottom Layer w0.5: R58.2@48.2,24.5 50,24.5 VT18.1@50.5,24 R60.2@50.5,21.5
NetR61_2: R61.2 R63.2 VT19.1 | length 5
  Bottom Layer w0.5: R61.2@48.2,32.5 48.3,32.5 50,32.5 VT19.1@50.5,32 R63.2@50.5,29.5
NetR67_2: R67.2 R69.2 VT20.1 | length 5
  Bottom Layer w0.5: R67.2@167.2,24.5 169,24.5 VT20.1@169.5,24 R69.2@169.5,21.5
NetR70_2: R70.2 R72.2 VT21.1 | length 5
  Bottom Layer w0.5: R70.2@167.2,32.5 169,32.5 VT21.1@169.5,32 R72.2@169.5,29.5
NetR73_2: R73.2 R75.2 VT22.1 | length 5
  Bottom Layer w0.5: R73.2@167.2,40.5 169,40.5 VT22.1@169.5,40 R75.2@169.5,37.5
NetR76_2: R76.2 R78.2 VT23.1 | length 5
  Bottom Layer w0.5: R76.2@184.2,24.5 186,24.5 VT23.1@186.5,24 R78.2@186.5,21.5
NetR79_2: R79.2 R81.2 VT24.1 | length 5
  Bottom Layer w0.5: R79.2@184.2,32.5 186,32.5 VT24.1@186.5,32 R81.2@186.5,29.5
NetR82_2: R82.2 R84.2 VT25.1 | length 5
  Bottom Layer w0.5: R82.2@184.2,40.5 186,40.5 VT25.1@186.5,40 R84.2@186.5,37.5
NetR85_2: R85.2 R87.2 VT26.1 | length 5
  Bottom Layer w0.5: R85.2@201.2,24.5 203,24.5 VT26.1@203.5,24 R87.2@203.5,21.5
NetR88_2: R88.2 R90.2 VT27.1 | length 5
  Bottom Layer w0.5: R88.2@201.2,32.5 203,32.5 VT27.1@203.5,32 R90.2@203.5,29.5
NetR91_2: R91.2 R93.2 VT28.1 | length 5
  Bottom Layer w0.5: R91.2@116.2,24.5 118,24.5 VT28.1@118.5,24 R93.2@118.5,21.5
NetR94_2: R94.2 R96.2 VT29.1 | length 5
  Bottom Layer w0.5: R94.2@116.2,32.5 118,32.5 VT29.1@118.5,32 R96.2@118.5,29.5
NetR97_2: R97.2 R99.2 VT30.1 | length 5
  Bottom Layer w0.5: R97.2@116.2,40.5 118,40.5 VT30.1@118.5,40 R99.2@118.5,37.5
NetR100_2: R100.2 R102.2 VT31.1 | length 5
  Bottom Layer w0.5: R100.2@133.2,24.5 135,24.5 VT31.1@135.5,24 R102.2@135.5,21.5
NetR103_2: R103.2 R105.2 VT32.1 | length 5
  Bottom Layer w0.5: R103.2@133.2,32.5 135,32.5 VT32.1@135.5,32 R105.2@135.5,29.5
NetR106_2: R106.2 R108.2 VT33.1 | length 5
  Bottom Layer w0.5: R106.2@133.2,40.5 135,40.5 VT33.1@135.5,40 R108.2@135.5,37.5
NetR109_2: R109.2 R111.2 VT34.1 | length 5
  Bottom Layer w0.5: R109.2@150.2,24.5 152,24.5 VT34.1@152.5,24 R111.2@152.5,21.5
NetR112_2: R112.2 R114.2 VT35.1 | length 5
  Bottom Layer w0.5: R112.2@150.2,32.5 152,32.5 VT35.1@152.5,32 R114.2@152.5,29.5
NetR134_2: R134.2 VT36.1 | length 2.1
  Top Layer w0.5: VT36.1@234.7,88.5 R134.2@234.7,90.6
NetR135_2: R135.2 VT36.3 | length 2.1
  Top Layer w0.5: VT36.3@232.16,88.5 232.16,90.56 R135.2@232.2,90.6
NetR136_2: R136.2 VT37.1 | length 2.1
  Top Layer w0.5: VT37.1@222,88.5 R136.2@222,90.6
NetR137_2: R137.2 VT37.3 | length 2.1
  Top Layer w0.5: VT37.3@219.46,88.5 219.46,90.56 R137.2@219.5,90.6
NetR138_2: R138.2 VT38.1 | length 2.1
  Top Layer w0.5: VT38.1@196.3,88.5 R138.2@196.3,90.6
NetR139_2: R139.2 VT38.3 | length 2.1
  Top Layer w0.5: VT38.3@193.76,88.5 193.76,90.56 R139.2@193.8,90.6
NetR140_2: R140.2 VT39.1 | length 2.1
  Top Layer w0.5: VT39.1@176,88.5 R140.2@176,90.6
NetR141_2: R141.2 VT39.3 | length 2.1
  Top Layer w0.5: VT39.3@173.46,88.5 173.46,90.56 R141.2@173.5,90.6
NetR142_2: R142.2 VT40.1 | length 2.1
  Top Layer w0.5: VT40.1@283.5,60.3 285.56,60.3 R142.2@285.6,60.34
NetR143_2: R143.2 VT40.3 | length 2.1
  Top Layer w0.5: VT40.3@283.5,62.84 R143.2@285.6,62.84
NetR144_2: R144.2 VT41.1 | length 2.1
  Top Layer w0.5: VT41.1@283.5,73.04 R144.2@285.6,73.04
NetR145_2: R145.2 VT41.3 | length 2.1
  Top Layer w0.5: VT41.3@283.5,75.58 285.56,75.58 R145.2@285.6,75.54
NetR146_2: R146.2 VT42.1 | length 2.1
  Top Layer w0.5: VT42.1@280.6,88.5 R146.2@280.6,90.6
NetR147_2: R147.2 VT42.3 | length 2.1
  Top Layer w0.5: VT42.3@278.06,88.5 278.06,90.56 R147.2@278.1,90.6
NetR148_2: R148.2 VT43.1 | length 2.1
  Top Layer w0.5: VT43.1@260.3,88.5 R148.2@260.3,90.6
NetR149_2: R149.2 VT43.3 | length 2.1
  Top Layer w0.5: VT43.3@257.76,88.5 257.76,90.56 R149.2@257.8,90.6
NetR169_2: R169.2 VT44.1 | length 2.1
  Top Layer w0.5: VT44.1@50.7,88.5 R169.2@50.7,90.6
NetR170_2: R170.2 VT44.3 | length 2.1
  Top Layer w0.5: VT44.3@48.16,88.5 48.16,90.56 R170.2@48.2,90.6
NetR171_2: R171.2 VT45.1 | length 2.1
  Top Layer w0.5: VT45.1@38,88.5 R171.2@38,90.6
NetR172_2: R172.2 VT45.3 | length 2.1
  Top Layer w0.5: VT45.3@35.46,88.5 35.46,90.56 R172.2@35.5,90.6
NetR173_2: R173.2 VT46.1 | length 2.1
  Top Layer w0.5: R173.2@19.4,83.6 VT46.1@21.5,83.6
NetR174_2: R174.2 VT46.3 | length 2.1
  Top Layer w0.5: R174.2@19.4,81.1 19.44,81.06 VT46.3@21.5,81.06
NetR175_2: R175.2 VT47.1 | length 2.1
  Top Layer w0.5: R175.2@19.4,70.9 VT47.1@21.5,70.9
NetR176_2: R176.2 VT47.3 | length 2.1
  Top Layer w0.5: R176.2@19.4,68.4 19.44,68.36 VT47.3@21.5,68.36
NetR177_2: R177.2 VT48.1 | length 2.1
  Top Layer w0.5: VT48.1@142.6,88.5 R177.2@142.6,90.6
NetR178_2: R178.2 VT48.3 | length 2.1
  Top Layer w0.5: VT48.3@140.06,88.5 140.06,90.56 R178.2@140.1,90.6
NetR179_2: R179.2 VT49.1 | length 2.1
  Top Layer w0.5: VT49.1@122.3,88.5 R179.2@122.3,90.6
NetR180_2: R180.2 VT49.3 | length 2.1
  Top Layer w0.5: VT49.3@119.76,88.5 119.76,90.56 R180.2@119.8,90.6
NetR181_2: R181.2 VT50.1 | length 2.1
  Top Layer w0.5: VT50.1@96.7,88.5 R181.2@96.7,90.6
NetR182_2: R182.2 VT50.3 | length 2.1
  Top Layer w0.5: VT50.3@94.16,88.5 94.16,90.56 R182.2@94.2,90.6
NetR183_2: R183.2 VT51.1 | length 2.1
  Top Layer w0.5: VT51.1@83.9,88.5 R183.2@83.9,90.6
NetR184_2: R184.2 VT51.3 | length 2.1
  Top Layer w0.5: VT51.3@81.36,88.5 81.36,90.56 R184.2@81.4,90.6
NetVD5_1: VD5.1 VT4.2 XS1.1 XS1.9 | length 26.5
  Top Layer w0.7: XS1.9@70,10.62 70.04,10.66 70.04,20.5 ; VT4.2@70.04,24 70.04,20.5 ; VD5.1@75.5,20.5 70.04,20.5
  Bottom Layer w1: XS1.1@70,3 XS1.9@70,10.62
NetVD6_1: VD6.1 VT5.2 XS1.2 XS1.10 | length 35.5
  Top Layer w0.7: VT5.2@70.04,32 70.04,29.69 71.23,28.5 VD6.1@75.5,28.5 77.4,26.6 77.4,12.94 XS1.10@75.08,10.62
  Bottom Layer w1: XS1.2@75.08,3 XS1.10@75.08,10.62
NetVD7_1: VD7.1 VT6.2 XS1.3 XS1.11 | length 43.7
  Top Layer w0.7: VT6.2@70.04,40 70.04,37.69 71.23,36.5 VD7.1@75.5,36.5 78.6,33.4 78.6,12.18 XS1.11@80.16,10.62
  Bottom Layer w1: XS1.3@80.16,3 XS1.11@80.16,10.62
NetVD8_1: VD8.1 VT7.2 XS1.4 XS1.12 | length 27.2
  Top Layer w0.7: XS1.12@85.24,10.62 87.04,12.42 87.04,20.5 ; VT7.2@87.04,24 87.04,20.5 ; VD8.1@92.5,20.5 87.04,20.5
  Bottom Layer w1: XS1.4@85.24,3 XS1.12@85.24,10.62
NetVD9_1: VD9.1 VT8.2 XS1.5 XS1.13 | length 36.2
  Top Layer w0.7: VT8.2@87.04,32 87.04,29.69 88.23,28.5 VD9.1@92.5,28.5 94.4,26.6 94.4,14.7 XS1.13@90.32,10.62
  Bottom Layer w1: XS1.5@90.32,3 XS1.13@90.32,10.62
NetVD10_1: VD10.1 VT9.2 XS1.6 XS1.14 | length 43.1
  Top Layer w0.7: VT9.2@87.04,40 87.04,37.69 88.23,36.5 VD10.1@92.5,36.5 95.6,33.4 95.6,10.82 XS1.14@95.4,10.62
  Bottom Layer w1: XS1.6@95.4,3 XS1.14@95.4,10.62
NetVD11_1: VD11.1 VT10.2 XS1.7 XS1.15 | length 27.9
  Top Layer w0.7: XS1.15@100.48,10.62 100.63,10.77 104.04,14.18 104.04,20.5 ; VT10.2@104.04,24 104.04,20.5 ; VD11.1@109.5,20.5 104.04,20.5
  Bottom Layer w1: XS1.7@100.48,3 XS1.15@100.48,10.62
NetVD12_1: VD12.1 VT11.2 XS1.8 XS1.16 | length 37
  Top Layer w0.7: VT11.2@104.04,32 104.04,29.69 105.23,28.5 VD12.1@109.5,28.5 111.4,26.6 111.4,16.46 105.71,10.77 XS1.16@105.56,10.62
  Bottom Layer w1: XS1.8@105.56,3 XS1.16@105.56,10.62
NetVD13_1: VD13.1 VT12.2 XS2.1 XS2.9 | length 26.5
  Top Layer w0.7: XS2.9@19,10.62 19.04,10.66 19.04,20.5 ; VT12.2@19.04,24 19.04,20.5 ; VD13.1@24.5,20.5 19.04,20.5
  Bottom Layer w1: XS2.1@19,3 XS2.9@19,10.62
NetVD14_1: VD14.1 VT13.2 XS2.2 XS2.10 | length 35.5
  Top Layer w0.7: VT13.2@19.04,32 19.04,29.69 20.23,28.5 VD14.1@24.5,28.5 26.4,26.6 26.4,12.94 XS2.10@24.08,10.62
  Bottom Layer w1: XS2.2@24.08,3 XS2.10@24.08,10.62
NetVD15_1: VD15.1 VT14.2 XS2.3 XS2.11 | length 43.7
  Top Layer w0.7: VT14.2@19.04,40 19.04,37.69 20.23,36.5 VD15.1@24.5,36.5 27.6,33.4 27.6,12.18 XS2.11@29.16,10.62
  Bottom Layer w1: XS2.3@29.16,3 XS2.11@29.16,10.62
NetVD16_1: VD16.1 VT15.2 XS2.4 XS2.12 | length 27.2
  Top Layer w0.7: XS2.12@34.24,10.62 36.04,12.42 36.04,20.5 ; VT15.2@36.04,24 36.04,20.5 ; VD16.1@41.5,20.5 36.04,20.5
  Bottom Layer w1: XS2.4@34.24,3 XS2.12@34.24,10.62
NetVD17_1: VD17.1 VT16.2 XS2.5 XS2.13 | length 36.2
  Top Layer w0.7: VT16.2@36.04,32 36.04,29.69 37.23,28.5 VD17.1@41.5,28.5 43.4,26.6 43.4,14.7 XS2.13@39.32,10.62
  Bottom Layer w1: XS2.5@39.32,3 XS2.13@39.32,10.62
NetVD18_1: VD18.1 VT17.2 XS2.6 XS2.14 | length 43
  Top Layer w0.7: VT17.2@36.04,40 36.04,37.69 37.23,36.5 VD18.1@41.5,36.5 44.6,33.4 XS2.14@44.6,10.62
  Bottom Layer w1: XS2.6@44.4,3 XS2.14@44.4,10.62
NetVD19_1: VD19.1 VT18.2 XS2.7 XS2.15 | length 27.9
  Top Layer w0.7: XS2.15@49.48,10.62 53.04,14.18 53.04,20.5 ; VT18.2@53.04,24 53.04,20.5 ; VD19.1@58.5,20.5 53.04,20.5
  Bottom Layer w1: XS2.7@49.48,3 XS2.15@49.48,10.62
NetVD20_1: VD20.1 VT19.2 XS2.8 XS2.16 | length 37
  Top Layer w0.7: VT19.2@53.04,32 53.04,29.69 54.23,28.5 VD20.1@58.5,28.5 60.4,26.6 60.4,16.46 XS2.16@54.56,10.62
  Bottom Layer w1: XS2.8@54.56,3 XS2.16@54.56,10.62
NetVD21_1: VD21.1 VT20.2 XS3.1 XS3.9 | length 26.5
  Top Layer w0.7: XS3.9@172,10.62 172.04,10.66 172.04,20.5 ; VT20.2@172.04,24 172.04,20.5 ; VD21.1@177.5,20.5 172.04,20.5
  Bottom Layer w1: XS3.1@172,3 XS3.9@172,10.62
NetVD22_1: VD22.1 VT21.2 XS3.2 XS3.10 | length 35.5
  Top Layer w0.7: VT21.2@172.04,32 172.04,29.69 173.23,28.5 VD22.1@177.5,28.5 179.4,26.6 179.4,12.94 XS3.10@177.08,10.62
  Bottom Layer w1: XS3.2@177.08,3 XS3.10@177.08,10.62
NetVD23_1: VD23.1 VT22.2 XS3.3 XS3.11 | length 43.7
  Top Layer w0.7: VT22.2@172.04,40 172.04,37.69 173.23,36.5 VD23.1@177.5,36.5 180.6,33.4 180.6,12.18 XS3.11@182.16,10.62
  Bottom Layer w1: XS3.3@182.16,3 XS3.11@182.16,10.62
NetVD24_1: VD24.1 VT23.2 XS3.4 XS3.12 | length 27.2
  Top Layer w0.7: XS3.12@187.24,10.62 189.04,12.42 189.04,20.5 ; VT23.2@189.04,24 189.04,20.5 ; VD24.1@194.5,20.5 189.04,20.5
  Bottom Layer w1: XS3.4@187.24,3 XS3.12@187.24,10.62
NetVD25_1: VD25.1 VT24.2 XS3.5 XS3.13 | length 36.2
  Top Layer w0.7: VT24.2@189.04,32 189.04,29.69 190.23,28.5 VD25.1@194.5,28.5 196.4,26.6 196.4,14.7 XS3.13@192.32,10.62
  Bottom Layer w1: XS3.5@192.32,3 XS3.13@192.32,10.62
NetVD26_1: VD26.1 VT25.2 XS3.6 XS3.14 | length 43.1
  Top Layer w0.7: VT25.2@189.04,40 189.04,37.69 190.23,36.5 VD26.1@194.5,36.5 197.6,33.4 197.6,10.82 XS3.14@197.4,10.62
  Bottom Layer w1: XS3.6@197.4,3 XS3.14@197.4,10.62
NetVD27_1: VD27.1 VT26.2 XS3.7 XS3.15 | length 27.9
  Top Layer w0.7: XS3.15@202.48,10.62 206.04,14.18 206.04,20.5 ; VT26.2@206.04,24 206.04,20.5 ; VD27.1@211.5,20.5 206.04,20.5
  Bottom Layer w1: XS3.7@202.48,3 XS3.15@202.48,10.62
NetVD28_1: VD28.1 VT27.2 XS3.8 XS3.16 | length 37
  Top Layer w0.7: VT27.2@206.04,32 206.04,29.69 207.23,28.5 VD28.1@211.5,28.5 213.4,26.6 213.4,16.46 XS3.16@207.56,10.62
  Bottom Layer w1: XS3.8@207.56,3 XS3.16@207.56,10.62
NetVD29_1: VD29.1 VT28.2 XS4.1 XS4.9 | length 26.5
  Top Layer w0.7: XS4.9@121,10.62 121.04,10.66 121.04,20.5 ; VT28.2@121.04,24 121.04,20.5 ; VD29.1@126.5,20.5 121.04,20.5
  Bottom Layer w1: XS4.1@121,3 XS4.9@121,10.62
NetVD30_1: VD30.1 VT29.2 XS4.2 XS4.10 | length 35.5
  Top Layer w0.7: VT29.2@121.04,32 121.04,29.69 122.23,28.5 VD30.1@126.5,28.5 128.4,26.6 128.4,12.94 XS4.10@126.08,10.62
  Bottom Layer w1: XS4.2@126.08,3 XS4.10@126.08,10.62
NetVD31_1: VD31.1 VT30.2 XS4.3 XS4.11 | length 43.7
  Top Layer w0.7: VT30.2@121.04,40 121.04,37.69 122.23,36.5 VD31.1@126.5,36.5 129.6,33.4 129.6,12.18 XS4.11@131.16,10.62
  Bottom Layer w1: XS4.3@131.16,3 XS4.11@131.16,10.62
NetVD32_1: VD32.1 VT31.2 XS4.4 XS4.12 | length 27.2
  Top Layer w0.7: XS4.12@136.24,10.62 138.04,12.42 138.04,20.5 ; VT31.2@138.04,24 138.04,20.5 ; VD32.1@143.5,20.5 138.04,20.5
  Bottom Layer w1: XS4.4@136.24,3 XS4.12@136.24,10.62
NetVD33_1: VD33.1 VT32.2 XS4.5 XS4.13 | length 36.2
  Top Layer w0.7: VT32.2@138.04,32 138.04,29.69 139.23,28.5 VD33.1@143.5,28.5 145.4,26.6 145.4,14.7 141.476,10.776 XS4.13@141.32,10.62
  Bottom Layer w1: XS4.5@141.32,3 XS4.13@141.32,10.62
NetVD34_1: VD34.1 VT33.2 XS4.6 XS4.14 | length 43.1
  Top Layer w0.7: VT33.2@138.04,40 138.04,37.69 139.23,36.5 VD34.1@143.5,36.5 146.6,33.4 146.6,10.82 XS4.14@146.4,10.62
  Bottom Layer w1: XS4.6@146.4,3 XS4.14@146.4,10.62
NetVD35_1: VD35.1 VT34.2 XS4.7 XS4.15 | length 27.9
  Top Layer w0.7: XS4.15@151.48,10.62 151.636,10.776 155.04,14.18 155.04,20.5 ; VT34.2@155.04,24 155.04,20.5 ; VD35.1@160.5,20.5 155.04,20.5
  Bottom Layer w1: XS4.7@151.48,3 XS4.15@151.48,10.62
NetVD36_1: VD36.1 VT35.2 XS4.8 XS4.16 | length 37
  Top Layer w0.7: VT35.2@155.04,32 155.04,29.69 156.23,28.5 VD36.1@160.5,28.5 162.4,26.6 162.4,16.46 156.716,10.776 XS4.16@156.56,10.62
  Bottom Layer w1: XS4.8@156.56,3 XS4.16@156.56,10.62
NetVT1_2: VT1.2 XP2.1 XP2.2
NetVT36_2: VT36.2 XS5.1 XS5.9 | length 23.5
  Top Layer w0.5: VT36.2@233.43,88.5 233.43,94.93 235,96.5 238.12,96.5 XS5.9@241,99.38
  Bottom Layer w1: XS5.9@241,99.38 XS5.1@241,107
NetVT36_4: VT36.4 XS5.3 XS5.11 | length 18.5
  Top Layer w0.5: XS5.11@230.84,99.38 230.89,99.33 VT36.4@230.89,88.5
  Bottom Layer w1: XS5.11@230.84,99.38 XS5.3@230.84,107
NetVT37_2: VT37.2 XS5.5 XS5.13 | length 18.5
  Top Layer w0.5: XS5.13@220.68,99.38 220.73,99.33 VT37.2@220.73,88.5
  Bottom Layer w1: XS5.13@220.68,99.38 XS5.5@220.68,107
NetVT37_4: VT37.4 XS5.7 XS5.15 | length 21.7
  Top Layer w0.5: XS5.15@210.52,99.38 218.19,91.71 VT37.4@218.19,88.5
  Bottom Layer w1: XS5.15@210.52,99.38 XS5.7@210.52,107
NetVT38_2: VT38.2 XS6.1 XS6.9 | length 18.5
  Top Layer w0.5: XS6.9@195,99.38 195.03,99.35 VT38.2@195.03,88.5
  Bottom Layer w1: XS6.9@195,99.38 XS6.1@195,107
NetVT38_4: VT38.4 XS6.3 XS6.11 | length 21.7
  Top Layer w0.5: XS6.11@184.84,99.38 192.49,91.73 VT38.4@192.49,88.5
  Bottom Layer w1: XS6.11@184.84,99.38 XS6.3@184.84,107
NetVT39_2: VT39.2 XS6.5 XS6.13 | length 18.5
  Top Layer w0.5: XS6.13@174.68,99.38 174.73,99.33 VT39.2@174.73,88.5
  Bottom Layer w1: XS6.13@174.68,99.38 XS6.5@174.68,107
NetVT39_4: VT39.4 XS6.7 XS6.15 | length 21.7
  Top Layer w0.5: XS6.15@164.52,99.38 172.19,91.71 VT39.4@172.19,88.5
  Bottom Layer w1: XS6.15@164.52,99.38 XS6.7@164.52,107
NetVT40_2: VT40.2 XS7.1 XS7.9 | length 23.5
  Top Layer w0.5: VT40.2@283.5,61.57 290.03,61.57 291.5,60.1 291.5,56.88 XS7.9@294.38,54
  Bottom Layer w1: XS7.9@294.38,54 XS7.1@302,54
NetVT40_4: VT40.4 XS7.3 XS7.11 | length 18.5
  Top Layer w0.5: VT40.4@283.5,64.11 294.33,64.11 XS7.11@294.38,64.16
  Bottom Layer w1: XS7.11@294.38,64.16 XS7.3@302,64.16
NetVT41_2: VT41.2 XS7.5 XS7.13 | length 18.5
  Top Layer w0.5: VT41.2@283.5,74.31 294.37,74.31 XS7.13@294.38,74.32
  Bottom Layer w1: XS7.13@294.38,74.32 XS7.5@302,74.32
NetVT41_4: VT41.4 XS7.7 XS7.15 | length 21.7
  Top Layer w0.5: VT41.4@283.5,76.85 286.75,76.85 XS7.15@294.38,84.48
  Bottom Layer w1: XS7.15@294.38,84.48 XS7.7@302,84.48
NetVT42_2: VT42.2 XS8.1 XS8.9 | length 23.6
  Top Layer w0.5: VT42.2@279.33,88.5 279.33,94.93 280.9,96.5 284.12,96.5 XS8.9@287,99.38
  Bottom Layer w1: XS8.9@287,99.38 XS8.1@287,107